# Altium PCB Injection_PCB.PcbDoc
Units mil, origin at the board's own origin, x right, y up, seen from the top; angles counter-clockwise.
Board outline 5275.59 x 5275.59 mil, 2 copper layers (Top Layer, Bottom Layer); 81 components, 94 nets, 442 pads, 422 vias.
Unrouted connection lines stored in the file: 236.
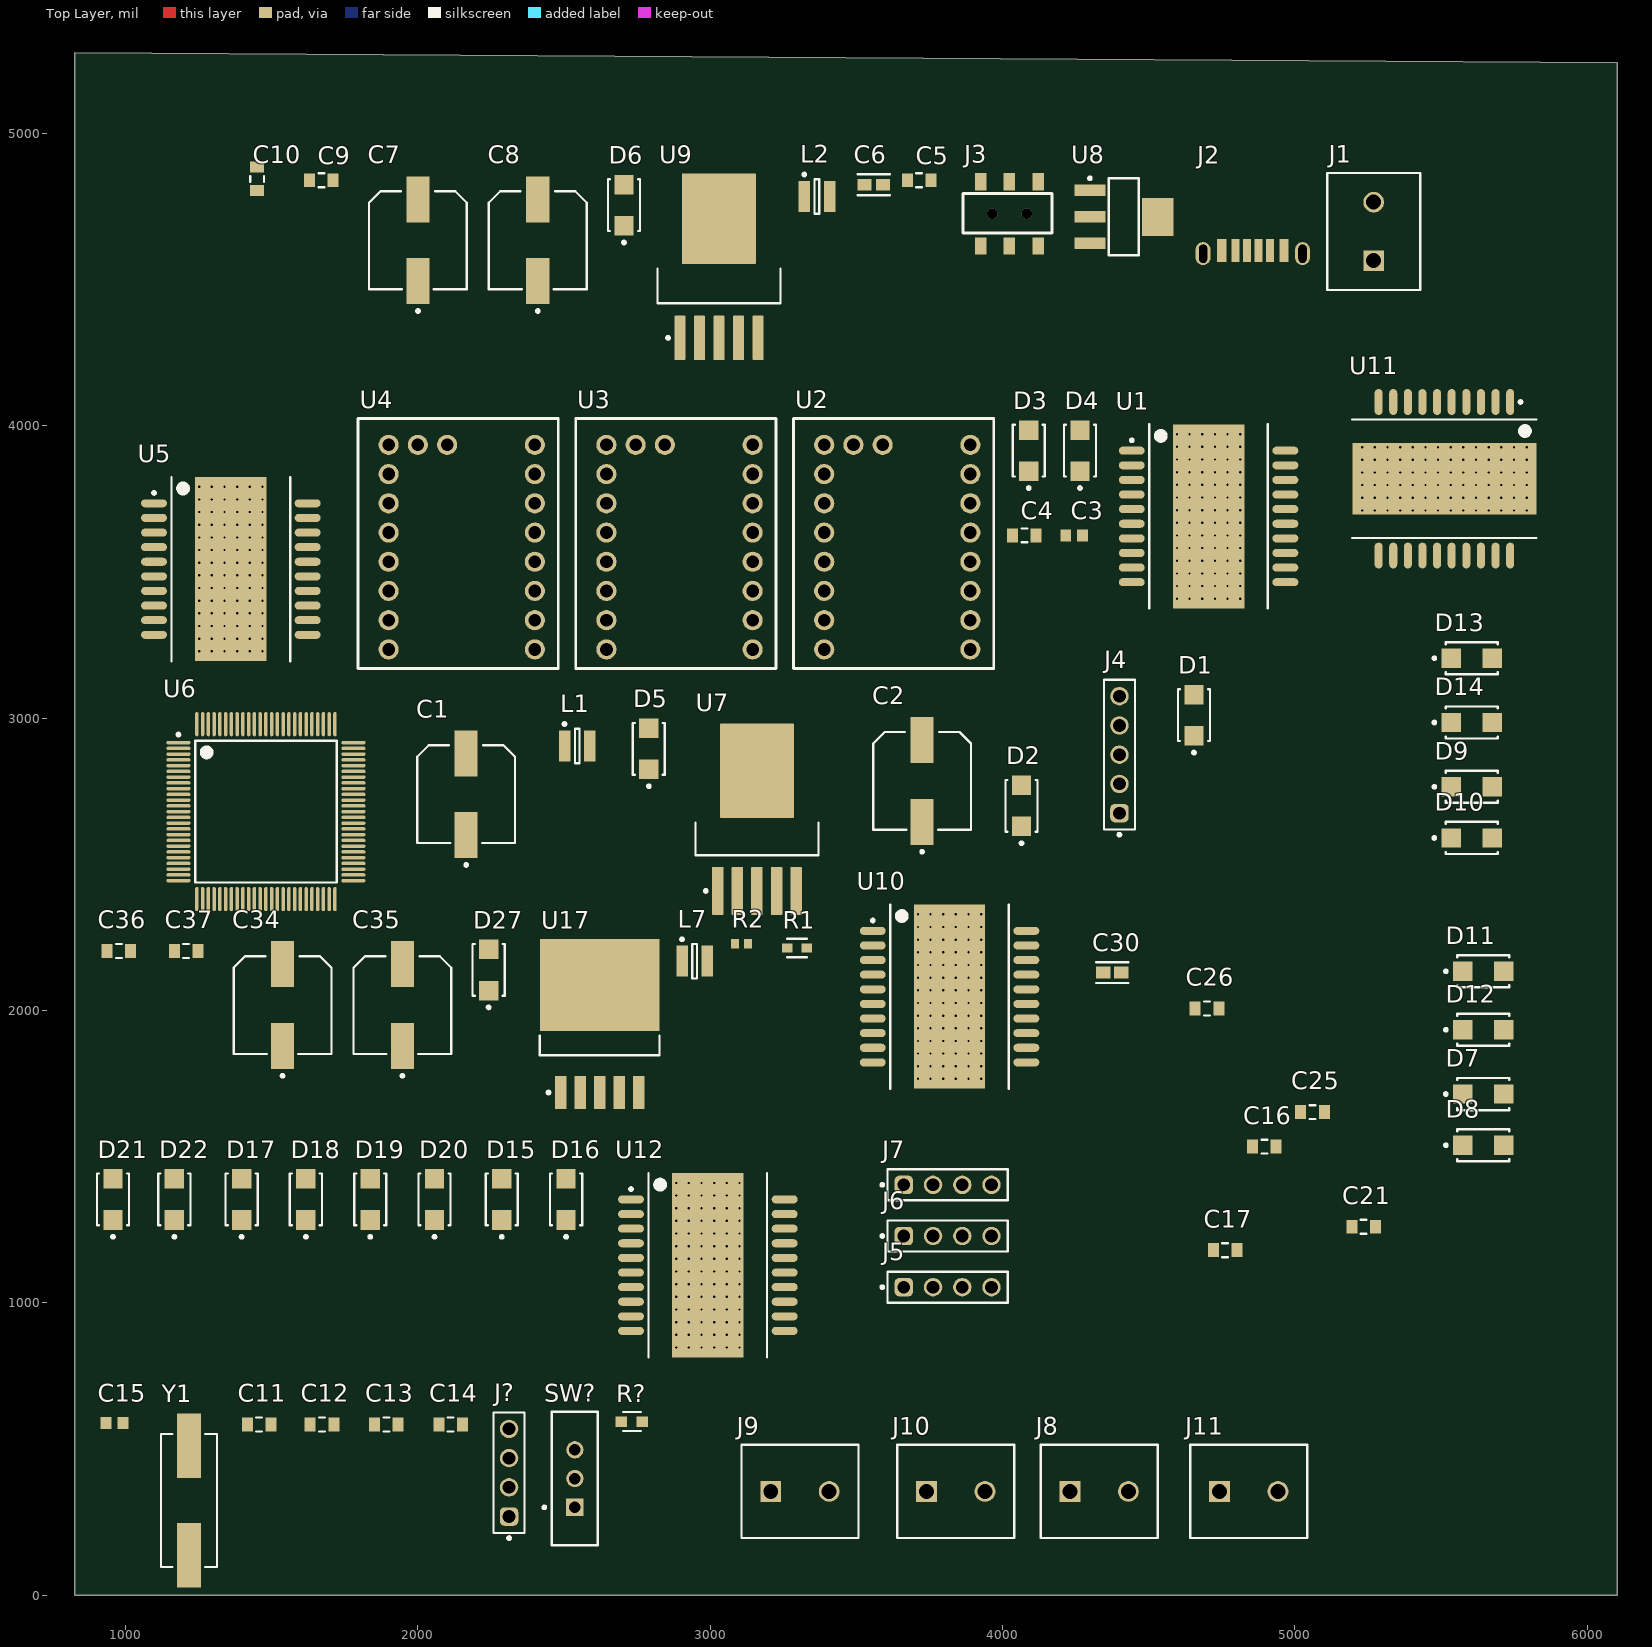
[diagram p0: Top Layer view]
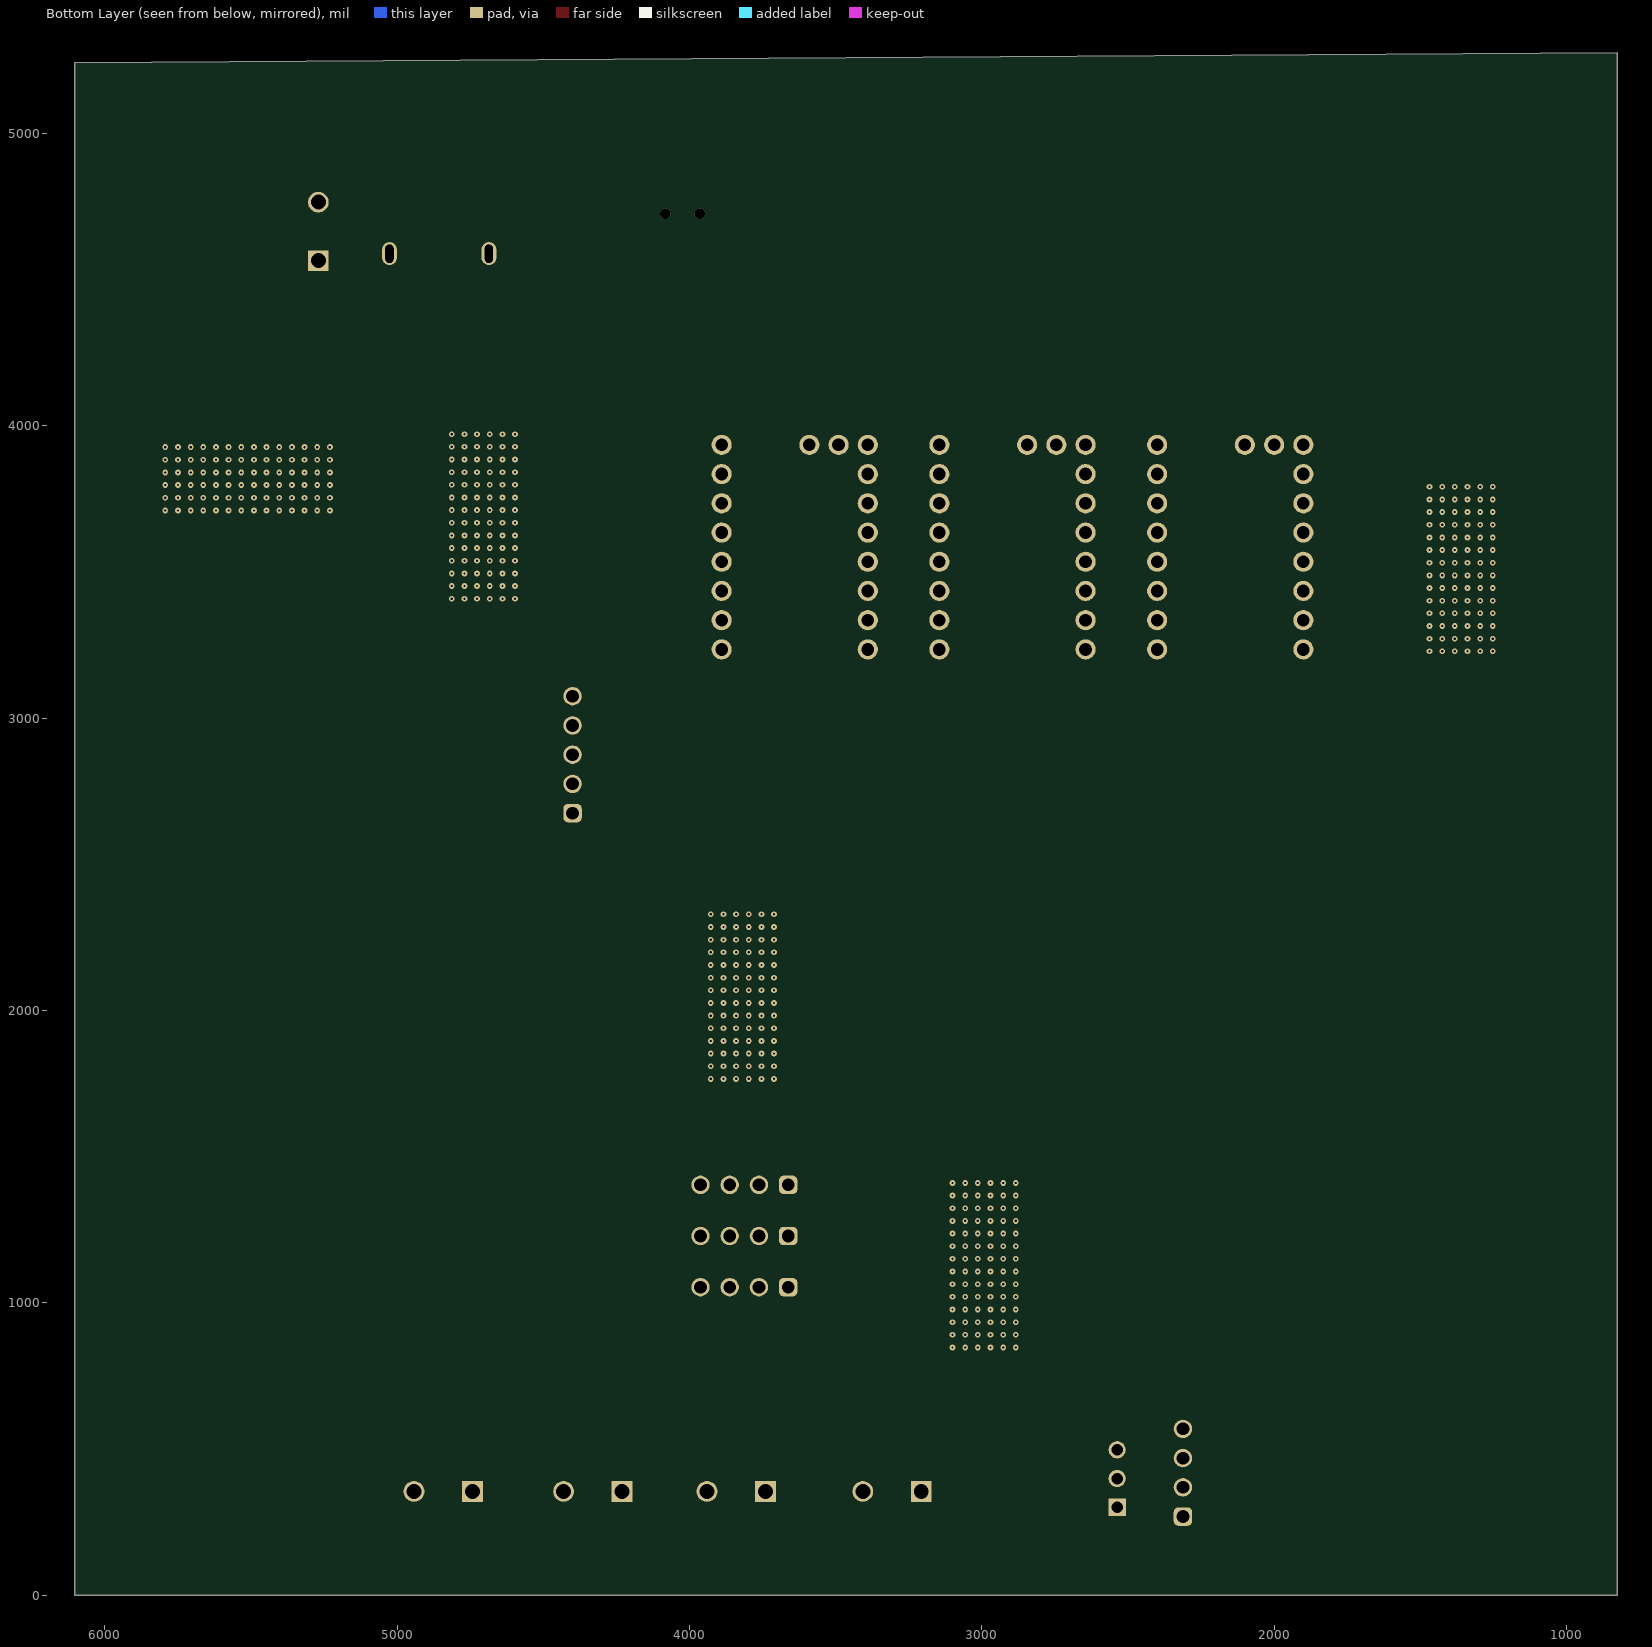
[diagram p1: Bottom Layer view, seen from below]

## Layer stack, top to bottom
Top Solder: solder mask 0.4, Solder Resist, Dk 3.5
Top Layer: signal copper 1.4
Dielectric 1: dielectric 12.6, FR-4, Dk 4.8
Bottom Layer: signal copper 1.4
Bottom Solder: solder mask 0.4, Solder Resist, Dk 3.5

## Board outline
826.77,5275.59 826.77,0 6102.36,0 6102.36,5241.55

## Design rules (kind name [scope] priority, off if disabled: settings)
Clearance [All] p1: gap=10 ignorepadtopadclearanceinfootprint=FALSE
PolygonConnect [All] p1: connectstyle=Relief reliefconductorwidth=10 reliefentries=4 polygonreliefangle="90 Angle" airgapwidth=10
RoutingVias [All] p1: holewidth=28 width=50 viastyle="Through Hole" minholewidth=28 minwidth=50 maxholewidth=28 maxwidth=50
SolderMaskExpansion [All] p1: expansion=4 istentingtop=FALSE
SupplyNets "Schematic Supply Nets_9" [InNet('+12_2')] p1: voltage=0.000
SupplyNets "Schematic Supply Nets_8" [InNet('+12_1')] p2: voltage=0.000
SupplyNets "Schematic Supply Nets_7" [InNet('+12_4')] p3: voltage=0.000
SupplyNets "Schematic Supply Nets_6" [InNet('+12_3')] p4: voltage=0.000
SupplyNets "Schematic Supply Nets_5" [InNet('+7')] p5: voltage=0.000
SupplyNets "Schematic Supply Nets_4" [InNet('GND')] p6: voltage=0.000
SupplyNets "Schematic Supply Nets_3" [InNet('+5')] p7: voltage=0.000
SupplyNets "Schematic Supply Nets_2" [InNet('+3.3')] p8: voltage=0.000
SupplyNets "Schematic Supply Nets_1" [InNet('+24')] p9: voltage=0.000
SupplyNets "Schematic Supply Nets" [InNet('VBUS')] p10: voltage=0.000
Width [All] p1: maxlimit=10 minlimit=10 preferedwidth=10
30 further rules are at their usual default settings.

## Classes and differential pairs
component class Power: C1 C2 C6 C7 C8 C16 C17 C21 C25 C26 C30 C34 C35 C36 C37 D5 D6 D27 J1 J2 J3 L1 L2 L7 R1 R2 U7 U8 U9 U17
component class Motor_Drivers: D1 D2 D3 D4 D7 D8 D9 D10 D11 D12 D13 D14 D15 D16 D17 D18 D19 D20 D21 D22 J4 J5 J6 J7 J8 J9 J10 J11 U1 U2 U3 U4 U5 U10 U11 U12
component class MCU: C3 C4 C5 C9 C10 C11 C12 C13 C14 C15 J? R? SW? U6 Y1

## Components (designator, comment, footprint, x,y, rotation, side; value= is the part's Value field where it differs from the comment)
C1 "EEEFT1E471AP" FP-FTF-MFG 2165,2740 r90 top
C2 "EEEFT1E471AP" FP-FTF-MFG 3725,2785 r90 top
C3 "GRM1885C1H220JA01D" CAPC1608X90X35ML10T15 4245,3625 r0 top
C4 "CGA3E2X7R1H104K080AA" FP-CGA3E-0_3-0_1-IPC_A 4075,3625 r0 top
C5 "CGA3E2X7R1H104K080AA" FP-CGA3E-0_3-0_1-IPC_A 3715,4840 r0 top
C6 "GRM188R60J106ME47D" FP-GRM188-0_1-e0_2_0_55-IPC_A 3560,4825 r0 top
C7 "EEEFT1E471AP" FP-FTF-MFG 2000,4635 r90 top
C8 "EEEFT1E471AP" FP-FTF-MFG 2410,4635 r90 top
C9 "CGA3E2X7R1H104K080AA" FP-CGA3E-0_3-0_1-IPC_A 1670,4840 r0 top
C10 "CGA3E2X7R1H104K080AA" FP-CGA3E-0_3-0_1-IPC_A 1450,4845 r90 top
C11 "CGA3E2X7R1H104K080AA" FP-CGA3E-0_3-0_1-IPC_A 1456.85,583.39 r0 top
C12 "CGA3E2X7R1H104K080AA" FP-CGA3E-0_3-0_1-IPC_A 1671.85,583.39 r0 top
C13 "CGA3E2X7R1H104K080AA" FP-CGA3E-0_3-0_1-IPC_A 1891.85,583.39 r0 top
C14 "CGA3E2X7R1H104K080AA" FP-CGA3E-0_3-0_1-IPC_A 2111.85,583.39 r0 top
C15 "GRM1885C1H220JA01D" CAPC1608X90X35ML10T15 961.85,588.39 r0 top
C16 "CGA3E2X7R1H104K080AA" FP-CGA3E-0_3-0_1-IPC_A 4896.1,1534.09 r0 top
C17 "CGA3E2X7R1H104K080AA" FP-CGA3E-0_3-0_1-IPC_A 4761.77,1179.76 r0 top
C21 "CGA3E2X7R1H104K080AA" FP-CGA3E-0_3-0_1-IPC_A 5235.24,1259.84 r0 top
C25 "CGA3E2X7R1H104K080AA" FP-CGA3E-0_3-0_1-IPC_A 5060.39,1652.2 r0 top
C26 "CGA3E2X7R1H104K080AA" FP-CGA3E-0_3-0_1-IPC_A 4699.72,2006.54 r0 top
C30 "UMK107SD152KA-T" FP-0603-L_1_6_0_1-W_0_8_0-IPC_A 4375.67,2129.65 r0 top
C34 "EEEFT1E471AP" FP-FTF-MFG 1536.85,2018.39 r90 top
C35 "EEEFT1E471AP" FP-FTF-MFG 1946.85,2018.39 r90 top
C36 "CGA3E2X7R1H104K080AA" FP-CGA3E-0_3-0_1-IPC_A 976.85,2203.39 r0 top
C37 "CGA3E2X7R1H104K080AA" FP-CGA3E-0_3-0_1-IPC_A 1206.85,2203.39 r0 top
D1 "SSA34-E3/61T" FP-95400-MFG 4655,3010 r90 top
D2 "SSA34-E3/61T" FP-95400-MFG 4065,2700 r90 top
D3 "SSA34-E3/61T" FP-95400-MFG 4090,3915 r90 top
D4 "SSA34-E3/61T" FP-95400-MFG 4265,3915 r90 top
D5 "SSA34-E3/61T" FP-95400-MFG 2790,2895 r90 top
D6 "SSA34-E3/61T" FP-95400-MFG 2705,4755 r90 top
D7 "SSA34-E3/61T" FP-95400-MFG 5644.72,1713.86 r0 top
D8 "SSA34-E3/61T" FP-95400-MFG 5644.72,1538.86 r0 top
D9 "SSA34-E3/61T" FP-95400-MFG 5605.35,2765.08 r0 top
D10 "SSA34-E3/61T" FP-95400-MFG 5605.35,2590.08 r0 top
D11 "SSA34-E3/61T" FP-95400-MFG 5644.72,2133.86 r0 top
D12 "SSA34-E3/61T" FP-95400-MFG 5644.72,1933.86 r0 top
D13 "SSA34-E3/61T" FP-95400-MFG 5605.35,3205.08 r0 top
D14 "SSA34-E3/61T" FP-95400-MFG 5605.35,2985.08 r0 top
D15 "SSA34-E3/61T" FP-95400-MFG 2286.85,1353.39 r90 top
D16 "SSA34-E3/61T" FP-95400-MFG 2506.85,1353.39 r90 top
D17 "SSA34-E3/61T" FP-95400-MFG 1396.85,1353.39 r90 top
D18 "SSA34-E3/61T" FP-95400-MFG 1616.85,1353.39 r90 top
D19 "SSA34-E3/61T" FP-95400-MFG 1836.85,1353.39 r90 top
D20 "SSA34-E3/61T" FP-95400-MFG 2056.85,1353.39 r90 top
D21 "SSA34-E3/61T" FP-95400-MFG 956.85,1353.39 r90 top
D22 "SSA34-E3/61T" FP-95400-MFG 1166.85,1353.39 r90 top
D27 "SSA34-E3/61T" FP-95400-MFG 2241.85,2138.39 r90 top
J1 "1729128" PHOE-1729128-2_V 5270,4665 r90 top
J2 "USBC" USBC 4750,4600 r0 top
J3 "SWITCH" PCBComponent_1 3925,4615 r0 top
J4 "61300511121" 61300511121 4400,2875 r90 top
J5 "61300411121" 61300411121 3812.44,1053.23 r0 top
J6 "61300411121" 61300411121 3812.44,1228.23 r0 top
J7 "61300411121" 61300411121 3812.44,1403.23 r0 top
J8 "1729128" PHOE-1729128-2_V 4330.71,354.33 r0 top
J9 "1729128" PHOE-1729128-2_V 3307.09,354.33 r0 top
J10 "1729128" PHOE-1729128-2_V 3840.16,354.33 r0 top
J11 "1729128" PHOE-1729128-2_V 4842.52,354.33 r0 top
J? "61300411121" 61300411121 2311.85,418.39 r90 top
L1 "SRN3015-330M" BOUR-SRN3015-2_V 2545,2905 r0 top
L2 "SRN3015-470M" BOUR-SRN3015-2_V 3365,4785 r0 top
L7 "SRN3015-470M" BOUR-SRN3015-2_V 2946.85,2168.39 r0 top
R1 "RT0603FRE0730KL" FP-RT0603-MFG 3296.85,2213.39 r0 top value=30KΩ
R2 "CRCW06036K80FKEA" RESC1609X50X30LL10T20 3106.85,2228.39 r0 top value=6.8k
R? "RP73D1J10KBTDG" FP-RP731J-MFG 2731.85,593.39 r0 top value=10KΩ
SW? "EG1218" ESWI-EG1218_V 2536.85,398.39 r90 top
U1 "L298P" STM-PowerSO20_M 4705,3690 r0 top
U2 "TMC2209" TCM2209_breakout 3390,3235 r0 top
U3 "TMC2209" TCM2209_breakout 2645,3235 r0 top
U4 "TMC2209" TCM2209_breakout 1900,3235 r0 top
U5 "L298P" STM-PowerSO20_M 1360,3510 r0 top
U6 "STM32F407VET6" STM-LQFP100_M 1480,2680 r0 top
U7 "LM2596S-3.3" KTT0005B_N 3160,2655 r90 top
U8 "LD1117AS33TR" SOT-223_M 4415,4715 r0 top
U9 "LM2596S-5.0" KTT0005B_L 3030,4545 r90 top
U10 "L298P" STM-PowerSO20_M 3818.9,2047.24 r0 top
U11 "L298P" STM-PowerSO20_M 5511.81,3818.9 r270 top
U12 "L298P" STM-PowerSO20_M 2991.85,1128.39 r0 top
U17 "LM2596S-ADJ" TS5B_L 2621.85,1953.39 r90 top
Y1 "ABLS-8.000MHZ-B2-T" FP-ABLS-MFG 1216.85,323.39 r90 top

## Footprints (in the part's own frame and the unit in brackets; to place one, negate y for a bottom-side part, rotate by r counter-clockwise, add the part's x,y. Pads: shape width x height; smd on the part's side, far side on the other; paste and mask are expansions set on the pad)
61300411121 [mm] "Pin Header, pitch 2.54 mm, THT, Vertical, single row, 4p"
  rrect50% 1.6x1.6 hole 1.1: 1(-3.81,0)
  round 1.6 hole 1.1: 2(-1.27,0) 3(1.27,0) 4(3.81,0)
  silkscreen extent -5.8,-1.35 5.23,1.35, body extent -5.08,-1.27 5.08,1.27, height 8.57
61300511121 [mm] "Pin Header, pitch 2.54 mm, THT, Vertical, single row, 5p"
  rrect50% 1.6x1.6 hole 1.1: 1(-5.08,0)
  round 1.6 hole 1.1: 2(-2.54,0) 3(0,0) 4(2.54,0) 5(5.08,0)
  silkscreen extent -7.07,-1.35 6.5,1.35, body extent -6.35,-1.27 6.35,1.27, height 8.57
BOUR-SRN3015-2_V [mm] "SMD, 2-Leads, Body 3x3mm, Height 1.5mm"
  rect 1x2.7 smd: 1(-1.1,0) 2(1.1,0)
  silkscreen extent -1.22,-1.5 0.2,2.02, body extent -1.5,-1.5 1.5,1.5, height 1.5
CAPC1608X90X35ML10T15 [mm] "Chip Capacitor, 2-Leads, Body 1.7x0.9mm, IPC Low Density"
  rect 0.95x1.05 smd: 1(-0.725,0) 2(0.725,0)
  body extent -0.85,-0.45 0.85,0.45, height 0.9
ESWI-EG1218_V [mm] "THD, 3-Leads, Body 11.6x4mm, Pitch 2.5mm"
  rect 1.5x1.5 hole 1: 1(-2.5,0)
  round 1.5 hole 1: 2(0,0) 3(2.5,0)
  silkscreen extent -5.8,-2 5.8,2.77, body extent -5.8,-2 5.8,2, height 7.4
FP-0603-L_1_6_0_1-W_0_8_0-IPC_A [mil]
  rect 49.52x39.85 smd paste+0 mask+0: 1(-30.6,0) 2(30.6,0)
  silkscreen extent -55,-36 55,36, body extent -75,-40 75,40, height 10
FP-95400-MFG [mm]
  rect 1.7x1.68 smd paste+0 mask+0: 1(-1.79,0) 2(1.79,0)
  silkscreen extent -3.37,-1.4 2.25,1.4, body extent -2.74,-1.5 2.74,1.5, height 0.25
FP-ABLS-MFG [mm]
  rect 5.6x2.1 smd paste+0 mask+0: 1(-4.75,0) 2(4.75,0)
  silkscreen extent -5.77,-2.42 5.77,2.42, body extent -7.65,-2.52 7.65,2.52, height 0.25
FP-CGA3E-0_3-0_1-IPC_A [mm]
  rect 0.956x1.206 smd paste+0 mask+0: 1(-1.025,0) 2(1.025,0)
  silkscreen extent -0.25,-0.6 0.25,0.6, body extent -2,-1.1 2,1.1, height 0.25
FP-FTF-MFG [mm]
  rect 4x2 smd paste+0 mask+0: 1(-3.55,0) 2(3.55,0)
  silkscreen extent -6.27,-4.25 4.25,4.25, body extent -5.8,-4.5 5.8,4.5, height 0.25
FP-GRM188-0_1-e0_2_0_55-IPC_A [mil]
  rect 47.57x39.85 smd paste+0 mask+0: 1(-31.57,0) 2(31.57,0)
  silkscreen extent -55,-36 55,36, body extent -75,-40 75,40, height 10
FP-RP731J-MFG [mm]
  rect 1x0.9 smd paste+0 mask+0: 1(-0.9,0) 2(0.9,0)
  silkscreen extent -0.77,-0.82 0.77,0.82, body extent -1.5,-0.55 1.5,0.55, height 0.25
FP-RT0603-MFG [mm]
  rect 0.9x0.8 smd paste+0 mask+0: 1(-0.85,0) 2(0.85,0)
  silkscreen extent -0.85,-0.81 0.86,0.8, body extent -1.4,-0.55 1.4,0.55, height 0.25
KTT0005B_L [mm] "DPAK, 5-Leads, Body 10.65x9.65mm, Pitch 1.7mm, IPC High Density"
  rrect11% 3.85x0.95 smd: 1(-6.2,3.4) 2(-6.2,1.7) 3(-6.2,0) 4(-6.2,-1.7) 5(-6.2,-3.4)
  rrect2% 7.9x6.4 smd: 6(4.15,0)
  silkscreen extent -6.32,-5.35 -0.2,5.35, body extent -3.2,-5.32 6.45,5.33, height 4.83
KTT0005B_N [mm] "DPAK, 5-Leads, Body 10.65x9.65mm, Pitch 1.7mm, IPC Medium Density"
  rrect10% 4.15x1 smd: 1(-6.25,3.4) 2(-6.25,1.7) 3(-6.25,0) 4(-6.25,-1.7) 5(-6.25,-3.4)
  rrect2% 8.2x6.4 smd: 6(4.2,0)
  silkscreen extent -6.37,-5.35 -0.3,5.35, body extent -3.15,-5.32 6.5,5.33, height 4.83
PCBComponent_1 [mm]
  rect 1x1.5 smd: 1(0,0) 2(2.5,0) 3(5,0) 4(0,5.6) 5(2.5,5.6) 6(5,5.6)
  silkscreen extent -1.52,1.14 6.22,4.57
PHOE-1729128-2_V [mm] "Receptacle, 2-Leads, Body 8.1x10.16mm, Pitch 5.08mm"
  rect 1.8x1.8 hole 1.3: 1(-2.54,0)
  round 1.8 hole 1.3: 2(2.54,0)
  silkscreen extent -5.08,-4.05 5.08,4.05, body extent -5.65,-4.05 5.08,4.05, height 10.01
RESC1609X50X30LL10T20 [mm] "Chip Resistor, 2-Leads, Body 1.55x0.85mm, IPC High Density"
  rect 0.7x0.85 smd: 1(-0.575,0) 2(0.575,0)
  body extent -0.82,-0.48 0.82,0.48, height 0.5
SOT-223_M [mm] "SOT223, 4-Leads, Body 6.5x3.5mm, Pitch 2.3mm, Lead Span 7mm, IPC Low Density"
  rect 2.7x1 smd: 1(-2.95,2.3) 2(-2.95,0) 3(-2.95,-2.3)
  rect 2.7x3.3 smd: 4(2.95,0)
  silkscreen extent -3.07,-3.35 1.3,3.47, body extent -1.85,-3.35 1.85,3.35, height 1.8
STM-LQFP100_M [mm] "Thin QFP, 100-Leads, Body 14x14mm, Pitch 0.5mm, IPC Low Density"
  oval 2.1x0.3 smd: 1(-7.6,6) 2(-7.6,5.5) 3(-7.6,5) 4(-7.6,4.5) 5(-7.6,4) 6(-7.6,3.5) 7(-7.6,3) 8(-7.6,2.5) 9(-7.6,2) 10(-7.6,1.5) 11(-7.6,1) 12(-7.6,0.5) 13(-7.6,0) 14(-7.6,-0.5) 15(-7.6,-1) 16(-7.6,-1.5) 17(-7.6,-2) 18(-7.6,-2.5) 19(-7.6,-3) 20(-7.6,-3.5) 21(-7.6,-4) 22(-7.6,-4.5) 23(-7.6,-5) 24(-7.6,-5.5) 25(-7.6,-6) 51(7.6,-6) 52(7.6,-5.5) 53(7.6,-5) 54(7.6,-4.5) 55(7.6,-4) 56(7.6,-3.5) 57(7.6,-3) 58(7.6,-2.5) 59(7.6,-2) 60(7.6,-1.5) 61(7.6,-1) 62(7.6,-0.5) 63(7.6,0) 64(7.6,0.5) 65(7.6,1) 66(7.6,1.5) 67(7.6,2) 68(7.6,2.5) 69(7.6,3) 70(7.6,3.5) 71(7.6,4) 72(7.6,4.5) 73(7.6,5) 74(7.6,5.5) 75(7.6,6)
  oval 0.3x2.1 smd: 26(-6,-7.6) 27(-5.5,-7.6) 28(-5,-7.6) 29(-4.5,-7.6) 30(-4,-7.6) 31(-3.5,-7.6) 32(-3,-7.6) 33(-2.5,-7.6) 34(-2,-7.6) 35(-1.5,-7.6) 36(-1,-7.6) 37(-0.5,-7.6) 38(0,-7.6) 39(0.5,-7.6) 40(1,-7.6) 41(1.5,-7.6) 42(2,-7.6) 43(2.5,-7.6) 44(3,-7.6) 45(3.5,-7.6) 46(4,-7.6) 47(4.5,-7.6) 48(5,-7.6) 49(5.5,-7.6) 50(6,-7.6) 76(6,7.6) 77(5.5,7.6) 78(5,7.6) 79(4.5,7.6) 80(4,7.6) 81(3.5,7.6) 82(3,7.6) 83(2.5,7.6) 84(2,7.6) 85(1.5,7.6) 86(1,7.6) 87(0.5,7.6) 88(0,7.6) 89(-0.5,7.6) 90(-1,7.6) 91(-1.5,7.6) 92(-2,7.6) 93(-2.5,7.6) 94(-3,7.6) 95(-3.5,7.6) 96(-4,7.6) 97(-4.5,7.6) 98(-5,7.6) 99(-5.5,7.6) 100(-6,7.6)
  silkscreen extent -7.72,-6.15 6.15,6.82, body extent -7,-7 7,7, height 1.6
STM-PowerSO20_M [mm] "SOIC, 20-Leads, Body 16x11.1mm, Pitch 1.27mm, Thermal Pad 16x6.2mm, IPC Low Density"
  oval 2.25x0.7 smd: 1(-6.675,5.715) 2(-6.675,4.445) 3(-6.675,3.175) 4(-6.675,1.905) 5(-6.675,0.635) 6(-6.675,-0.635) 7(-6.675,-1.905) 8(-6.675,-3.175) 9(-6.675,-4.445) 10(-6.675,-5.715) 11(6.675,-5.715) 12(6.675,-4.445) 13(6.675,-3.175) 14(6.675,-1.905) 15(6.675,-0.635) 16(6.675,0.635) 17(6.675,1.905) 18(6.675,3.175) 19(6.675,4.445) 20(6.675,5.715)
  rect 6.2x16 smd: 21(0,0)
  silkscreen extent -6.8,-8 5.15,8, body extent -7.1,-8 7.1,8, height 3.6
TCM2209_breakout [mm]
  round 1.75 hole 1.1: 1(0,17.78) 2(0,15.24) 3(0,12.7) 4(0,10.16) 5(0,7.62) 6(0,5.08) 7(0,2.54) 8(0,0) 9(12.7,0) 9(12.7,0) 10(12.7,2.54) 11(12.7,5.08) 12(12.7,7.62) 13(12.7,10.16) 14(12.7,12.7) 15(12.7,15.24) 16(12.7,17.78) 17(5.08,17.78) 18(2.54,17.78)
  silkscreen extent -2.67,-1.65 14.73,20.07, body extent -1.27,-1.27 13.97,19.05, height 16.75
TS5B_L [mm] "D2-PAK, 6-Leads, Body 8.6x10.2mm, Pitch 1.7mm, Lead Span 14.1mm, IPC High Density"
  rect 2.9x1 smd: 1(-5.95,3.4) 2(-5.95,1.7) 3(-5.95,0) 4(-5.95,-1.7) 5(-5.95,-3.4)
  rect 8x10.4 smd: 6(3.4,0)
  silkscreen extent -6.07,-5.2 -1,5.2, body extent -2.7,-5.2 6.19,5.2, height 4.65
USBC [mm]
  rect 0.8x2 smd: 1(0,0) 6(5.4,0)
  rect 0.7x2 smd: 2(1.2,0) 3(2.2,0) 4(3.2,0) 5(4.2,0)
  oval 1.3x2 hole 0.7 slot 1.6 at 90 deg: ""(-1.62,-0.28) ""(7.02,-0.28)
  body extent -1.83,-1.18 7.37,6.77, height 3.2

## Part data
C1 C2 C7 C8 C34 C35: library part CMP-05427-000040-1, "CAP ALUM 470UF 20% 25V SMD", Capacitance=470uF, Case/Package=Radial, Dielectric Material=Aluminium, ESR (Equivalent Series Resistance)=80mR, LCSC=C178591, Leakage Current=117.5uA, Max Operating Temperature=105°C, Min Operating Temperature=-55°C, Package Quantity=500, Ripple Current=850mA, Tolerance=20%, Voltage=25V, Construction=Cylindrical, Contact Plating=Tin, Diameter=8mm, Features="General Purpose", Height=10.2mm, Height - Seated (Max)=0.413inch, Lead Diameter=0.9mm, Lead Free="Lead Free", Lead Pitch=3.1mm, Length=10.2mm, Life (Hours)=2000Hour, Mount="Surface Mount", Number of Pins=2, Packaging="Tape and Reel", Radiation Hardening=No, REACH SVHC="No SVHC", Ripple Current (AC)=850mA, RoHS Compliant=Yes, Series=FT, Termination=SMD/SMT, Voltage Rating=25V, Voltage Rating (DC)=25V
C3 C15: library part CMP-2000-04945-1, "Chip Capacitor, 22 pF, +/- 5%, 50 V, -55 to 125 degC, 0603 (1608 Metric), RoHS, Tape and Reel", Capacitance=22pF, Case Size/Dimension=0603, Dielectric=C0G, Manufacturer=Murata, Package Description="2-Pin Surface Mount Device, Body 1.6 x 0.8 mm", Package Reference=603, Rated Voltage=50V, Tolerance (%)=±5%, Datasheet URL=https://datasheet.ciiva.com/11786/0900766b807a1cab-11786398.pdf, Datasheet Version=Jul-06, Manufacturer URL=http://www.murata.com/
C4 C5 C9 C10 C11 C12 C13 C14 C16 C17 C21 C25 C26 C36 C37: library part CMP-2000-07546-2, "Cap Ceramic 100nF 50V X7R 10% Pad SMD 0603 +125°C Automotive T/R", Capacitance=100nF, Case Code (Imperial)=0603, Case Code (Metric)=1608, Dielectric=X7R, LCSC=C14663, Max Operating Temperature=125°C, Min Operating Temperature=-55°C, Package Quantity=1, Ratings=AEC-Q200, Tolerance=10%, Voltage=50V, Case/Package=0603, Composition=Ceramic, Depth=0.8mm, Height=0.8mm, Lead Free="Lead Free", Length=1.6mm, Mount="Surface Mount", Packaging="Tape and Reel", Radiation Hardening=No, REACH SVHC="No SVHC", Termination=SMD/SMT, Thickness=0.035inch, Voltage Rating=50V, Voltage Rating (DC)=50V, Weight=7.1E-05oz, Width=0.8mm
C6: library part CMP-2006-02792-2, "Chip Multilayer Ceramic Capacitors for General Purpose, 0603, 10uF, X5R, 15%, 20%, 6.3V", Capacitance=10uF, Case Code (Imperial)=0603, Case Code (Metric)=1608, Dielectric=X5R, LCSC=C385035, Max Operating Temperature=85°C, Min Operating Temperature=-55°C, Package Quantity=4000, Tolerance=20%, Voltage=6.3V, Case/Package=0603, Depth=0.8mm, Height=0.8mm, Lead Free="Lead Free", Length=1.6mm, Material=Ceramic, Mount="Surface Mount", Packaging="Tape and Reel", Radiation Hardening=No, REACH SVHC="No SVHC", Termination=SMD/SMT, Thickness=0.035inch, Voltage Rating=6.3V, Voltage Rating (DC)=6.3V, Width=0.031inch
C30: library part CMP-14477-003947-2, "None", Capacitance=1.5nF, Case Code (Imperial)=0603, Case Code (Metric)=1608, Dielectric Material=Ceramic, Max Operating Temperature=125°C, Min Operating Temperature=-55°C, Package Quantity=4000, Tolerance=10%, Voltage Rating=50V, Case/Package=0603, Construction=Flat, Depth=0.8mm, Halogen Free="Halogen Free", Height=0.8mm, Lead Free="Lead Free", Length=0.063inch, Mount="Surface Mount", Number of Pins=2, Packaging="Tape and Reel", Radiation Hardening=No, RoHS Compliant=Yes, Series=CFCAP™, Termination=SMD/SMT, Thickness=0.035inch, Voltage Rating (DC)=50V, Width=0.031inch
D1 D2 D3 D4 D5 D6 D7 D8 D9 D10 D11 D12 D13 D14 D15 D16 D17 D18 D19 D20 D21 D22 D27: library part CMP-02539-000022-2, "DIODE SCHOTTKY 40V 3A DO214AC", Average Rectified Current=3A, Case/Package=SMA, Forward Voltage=490mV, LCSC=C466998, Max Forward Surge Current (Ifsm)=75A, Max Operating Temperature=150°C, Max Repetitive Reverse Voltage (Vrrm)=40V, Max Reverse Current=200uA, Min Operating Temperature=-65°C, Package Quantity=1, Contact Plating=Tin, Current Rating=3A, Element Configuration=Single, Forward Current=3A, Height=2.087mm, Lead Free="Lead Free", Length=4.5mm, Max Reverse Leakage Current=200uA, Max Reverse Voltage (DC)=40V, Max Surge Current=75A, Mount="Surface Mount", Number of Pins=2, Output Current=3A, Packaging="Tape and Reel", Peak Non-Repetitive Surge Current=75A, Polarity=Standard, Radiation Hardening=No, RoHS Compliant=Yes, Voltage Rating (DC)=40V, Width=2.79mm
J1 J8 J9 J10 J11: library part CMP-2000-05815-1, "PCB Terminal Block, 13.5 A, 400 V, 2-Pin THD, RoHS, Bulk", Current Rating=13500mA, Manufacturer="Phoenix Contact", Package Description="2-Pin Through Hole Device, Body 8.1 x 10.16 mm, Pitch 5.08 mm", Package Reference=1729128-2, Package Version=03/2015, Voltage Rating=400V, Datasheet URL=https://datasheet.ciiva.com/16046/1729128-16046181.pdf, Datasheet Version=12/2013, Manufacturer URL=http://www.phoenixcontact.com/, Mounting Technology=ThroughHole, No. of Positions=2, No. of Rows=1, Orientation=Horizontal, Package URL=https://www.phoenixcontact.com/online/portal/pi/pxc/product_detail_page/!ut/p/b1/3VdJjqNKFDxLH8AFycySyWY2ozFsEPOMMQaDOX1XedGL_1Vdm5YXJleknhSKeBkvI6EA8ncAo3AYoDhBQGco6KN7VURTdemj9us_IEKEZo_YHiPAEWEFmDGOHMORkqKYCORBZxgL7ZoaZYcbFFUZ3fqxSY6GOuxydWUuHqz1ynmMFygu583Bob0Ewr6Sd_l-5m-kAueHiB0jpRwZwe58wwtkpxtMYd_LmGcDRU02dRNEyWt6Y2ti5pSyJ_reIkzIulrqApdnbT11V5jnCKbYNCvhEM1MCpPByat_X379-iThf08CI5GfOPqfBeS3BRoBOdD55AKVv0iLwCMq-2BrzXWSGRH7pUGD9uwXQjiph3xL0DKQwdGa0JImiIOmBNOestqgwTHSSs2oOep-78apyXQBvNi8ZLaFjvjWvcaUEBu0MC6Wbe-d6mB0FAebo2lUWinqYaZs5DAYzV0RP9yitUjnGJ0iI9xhZkT42OCQNUJJhkgWINNQLP2JFP6OpMg3JCVg70jqHT0lvKOnhHf0lPuOnnLf0VPuWx6_dxwUIvwk5WMkT0kLL1mh61l2yZVSzG3pYV_bqo-mj6uMKwKwdnnW8Jh5RTOJzMOA5c-eJDaZQw4mTMPH02PvS_ZAqNVjVTo2WyYLkwH_KU1mmmG5kjRhDqPXLwwVHvVOjCM60-fpXvTDfMGW1PVFVS1r4e4yVDk4ZdNbkUHvqPqQSeian4UD39fNKmachqdJ1NJbyk8rXT9mXTvPk3oE5meulKGgiruPJek-4I9hTT6G8ZLOyRSm2RRVbThERQad5OS28hdt4YW4vG0stgYYzsWsK4_7y6DZMjJSCqri1kyiZR5vD7pwIrNR7QwPHTcLTI5qT7eRlpHrdGiupYlqQDJ7zy_CND8fWWBoLRXxk1RVcXiBQwbTD4Xi7KL-FuO94t9xaqweXzH, Packing=Bulk, PartNumber=1729128, Pitch=5.08mm, RoHS=TRUE
J2: LCSC=C5187411
J3: library part SMD_SWITCH, LCSC=C2837066
J4: library part CMP-1502-01068-3, Color=Black, Contact Resistance=20mΩ, Current Rating=3A, Max Operating Temperature=105°C, Min Operating Temperature=-40°C, Operating Supply Voltage=250V, Connector Type="Male Pin", Contact Material=Copper, Contact Mating Length=5.9944mm, Contact Plating=Gold, Gender=Male, Height=8.89mm, Lead Free="Lead Free", Lead Pitch=2.54mm, Mount="Through Hole", NexarPartId=32855526, Number of Contacts=5, Number of Pins=5, Number of Positions=5, Number of Rows=1, Orientation=Vertical, Packaging=Bulk, Pitch=2.54mm, REACH SVHC=Unknown, RoHS=Compliant, Termination=Solder, Voltage Rating=250V
J5 J6 J7 J?: library part CMP-1502-01064-3, Color=Black, Contact Resistance=20mΩ, Current Rating=3A, Max Operating Temperature=105°C, Min Operating Temperature=-40°C, Operating Supply Voltage=250V, Connector Type="Male Pin", Contact Material=Copper, Contact Mating Length=5.9944mm, Contact Plating=Gold, Gender=Male, Height=8.89mm, Lead Free="Lead Free", Lead Pitch=2.54mm, Mount="Through Hole", NexarPartId=32855522, Number of Contacts=4, Number of Pins=4, Number of Positions=4, Number of Rows=1, Orientation=Vertical, Packaging=Bulk, Pitch=2.54mm, REACH SVHC=Unknown, RoHS=Compliant, Termination=Solder, Voltage Rating=250V
L1: library part CMP-0007-00002-1, "Semi-shielded Power Inductor, 33 uH, +/- 20%, 0.5 A, -40 to 125 degC, 3 x 3 x 1.5 mm SMD, RoHS and Halogen Free, Tape and Reel", Inductance="33 uH", Inductance tolerance="+/- 20%", LCSC=C2903004, Manufacturer=Bourns, Operating Temperature="-40 to 125 degC", Rated current="0.5 A", Resistance to Solder Heat="+260 degC for 10 sec.", ComponentLink1Description="Manufacturer URL", ComponentLink1URL=http://www.bourns.com/, ComponentLink2Description=Datasheet, ComponentLink2URL=http://www.bourns.com/data/global/pdfs/SRN3015.pdf, ComponentLink3Description="Package Specification", ComponentLink3URL=http://www.bourns.com/data/global/pdfs/SRN3015.pdf, DatasheetVersion=Aug-11, DCR Max="0.959 Ohm", Isat="0.46 A", Mounting Technology="Surface Mount", PackageDescription="2-Pin SMD, Body 3 x 3 mm, Height 1.5 mm", PackageReference=SRN3015, Packing="Tape and Reel", PartNumber=SRN3015-330M, RoHS=TRUE, SRF Min="22 MHz"
L2 L7: library part CMP-0007-00006-1, "Semi-shielded Power Inductor, 47 uH, +/- 20%, 0.4 A, -40 to 125 degC, 3 x 3 x 1.5 mm SMD, RoHS and Halogen Free, Tape and Reel", Inductance="47 uH", Inductance tolerance="+/- 20%", LCSC=C3222246, Manufacturer=Bourns, Operating Temperature="-40 to 125 degC", Rated current="0.4 A", Resistance to Solder Heat="+260 degC for 10 sec.", ComponentLink1Description="Manufacturer URL", ComponentLink1URL=http://www.bourns.com/, ComponentLink2Description=Datasheet, ComponentLink2URL=http://www.bourns.com/data/global/pdfs/SRN3015.pdf, ComponentLink3Description="Package Specification", ComponentLink3URL=http://www.bourns.com/data/global/pdfs/SRN3015.pdf, DatasheetVersion=Aug-11, DCR Max="1.406 Ohm", Isat="0.38 A", Mounting Technology="Surface Mount", PackageDescription="2-Pin SMD, Body 3 x 3 mm, Height 1.5 mm", PackageReference=SRN3015, Packing="Tape and Reel", PartNumber=SRN3015-470M, RoHS=TRUE, SRF Min="18 MHz"
R1: library part CMP-2000-04724-2, "RES SMD 30K OHM 1% 1/10W 0603", Manufacturer=Yageo, Package=RT0603, Power Rating=0.1W, Resistance=30KΩ, Temperature="-55°C to +155°C", Temperature Coefficient="50 ppm/°C", Temperature Range High=+155°C, Temperature Range Low=-55°C, Tolerance=0.01, Voltage Rating=75V, Automotive=No, Category=Res, ComponentLink2Description=Datasheet, ComponentLink2URL=http://www.yageo.com/documents/recent/PYu-RT_1-to-0.01_RoHS_L_9.pdf, Composition="Thin Film", Device Class L1="Passive Components", Device Class L2=Resistors, Device Class L3="Chip SMD Resistors", Digikey Description="RES SMD 30K OHM 1% 1/10W 0603", Footprint Url=http://www.yageo.com/exep/pages/download/literatures/PYu-R_Mount_10.pdf, Height=0.55mm, Ipc Land Pattern Name=RESC16080X45, Lead Free=Yes, Manufacturer Part Number=RT0603FRE0730KL, Mouser Description="Thin Film Resistors - SMD 1/10W 30K ohm 1% 50ppm", Octopart=https://octopart.com/rt0603fre0730kl-yageo-1290535, RoHS=TRUE, Series=RT
R2: library part CMP-2000-03550-1, LCSC=C269697, Manufacturer="Vishay Dale", Part Number=CRCW06036K80FKEA
R?: library part CMP-03211-006887-1, "TE CONNECTIVITY / HOLSWORTHY SMD Chip Resistor, Thin Film, 10KΩ, 50 V, 0603 [1608 Metric], 100 mW, 0.1% , RP73 Series", Manufacturer="TE Connectivity", Package=RP731J, Power Rating=0.1W, Resistance=10KΩ, Temperature="-55°C to +105°C", Temperature Coefficient=15ppm/°C, Temperature Range High=+105°C, Temperature Range Low=-55°C, Tolerance=0.1%, Voltage Rating=75V, Automotive=No, Category=Res, ComponentLink2Description=Datasheet, ComponentLink2URL=https://www.te.com/commerce/DocumentDelivery/DDEController?Action=srchrtrv&DocNm=1773272&DocType=DS&DocLang=English, Composition="Thin Film", Device Class L1="Passive Components", Device Class L2=Resistors, Device Class L3="Chip SMD Resistors", Height=0.55mm, Ipc Land Pattern Name=RESC15580X45, Lead Free=Yes, Manufacturer Part Number=RP73D1J10KBTDG, Octopart=https://octopart.com/rp73d1j10kbtdg-te+connectivity-42631518, octopart_url=https://octopart.com/rp73d1j10kbtdg-te+connectivity-42631518, Packaging="cut tape", RoHS=TRUE, Series=RP73
SW?: library part CMP-1696-00002-1, "Slide Switch, 500 V, -20 to 70 degC, 3-Pin THD, RoHS", Case\Package=SOT-23-5, Dropout Voltage="300 mV", Max Input Voltage="8 V", Max Operating Temperature="85 degC", Max Ouput Current="150 mA", Max Power Dissipation="250 mW", Min Input Voltage="4.3 V", Min Operating Temperature="-40 degC", Nominal Output Voltage="3.3 V", Package Quantity=3000, ComponentLink1Description="Manufacturer URL", ComponentLink1URL=http://www.e-switch.ch/en/, ComponentLink2Description=Datasheet, ComponentLink2URL=https://www.e-switch.com/system/asset/product_line/data_sheet/119/EG.pdf, DatasheetVersion=Oct-15, Height="1.3 mm", Length="3 mm", Mount="Surface Mount", Output Current="150 mA", Output Voltage="3.3 V", Outputs=1, PackageDescription="3-Pin Through Hole Device, Body 11.6 x 4 mm, Pitch 2.5 mm", PackageReference=EG1218, Packaging="Tape and Reel", Pins=5, Power Rating="250 mW", Radiation Hardening=No, REACH SVHC="No SVHC", RoHSCompliant=true, Width="1.8 mm"
U1 U5 U10 U11 U12: library part CMP-2100-03649-1, "Dual Full-Bridge Driver, 4.5 to 7 V, -25 to 130 degC, 20-Pin SOIC, RoHS, Tube", Case/Package=SOIC, Collector Emitter Voltage (VCEO)=46V, LCSC=C17179540, Manufacturer=STMicroelectronics, Max Collector Current=3A, Max Operating Temperature=130degC, Min Operating Temperature=-25degC, Min Supply Voltage=4.8V, Operating Supply Current=13mA, Output Current=2A, Package Description="20-Pin Small Outline Integrated Circuits, Body 15.9 x 11 mm, Pitch 1.27 mm", Package Quantity=31, Package Reference=PowerSO20, Supply Voltage=42V, Datasheet URL=http://www.st.com/content/ccc/resource/technical/document/datasheet/82/cc/3f/39/0a/29/4d/f0/CD00000240.pdf/files/CD00000240.pdf/jcr:content/translations/en.CD00000240.pdf, Datasheet Version=36526.0, Height=3.3mm, Lead Free=LeadFree, Length=16mm, Manufacturer URL=http://www.st.com/, Max Output Current=3A, Max Supply Voltage=46V, Mount=SurfaceMount, Number of Channels=2, Number of Pins=20, Output Current per Channel=2A, Packaging=Rail/Tube, Radiation Hardening=No, RoHSCompliant=true, Width=11.1mm
U2 U3 U4: library part TMC2209_plug
U6: library part CMP-0243-00016-3, "ARM Cortex-M4 32-bit MCU+FPU, 210 DMIPS, 512 kB Flash, 192 kB Internal RAM, 82 I/Os, 100-pin LQFP, -40 to 85 degC, Tray", I/Os (High Current)=82, LCSC=C28730, Manufacturer=STMicroelectronics, Operating Frequency(F) (Processor speed) (MHz)=168, Supply Voltage(Vcc) max (V)=3.6, Supply Voltage(Vcc) min (V)=1.8, ComponentLink1Description="Manufacturer URL", ComponentLink1URL=http://www.st.com/web/en/home.html, ComponentLink2Description=Datasheet, ComponentLink2URL=http://www.st.com/st-web-ui/static/active/en/resource/technical/document/datasheet/DM00037051.pdf, ComponentLink3Description="Package Specification", ComponentLink3URL=http://www.st.com/st-web-ui/static/active/en/resource/technical/document/data_brief/DM00071938.pdf, Core="ARM Cortex-M4", D/A Converter=2x12-bit, DatasheetVersion="Rev. 4", FLASH Size (Prog) (kB)=512, Internal RAM Size (kB)=192, Mounting Technology="Surface Mount", PackageDescription="100-Pin Low Profile Quad Flat Package, 14 x 14 mm Body, 0.5 mm Pitch", PackageReference=LQFP100, PackageVersion="Rev. 1, 06/2013", Packing=Tray, PartNumber=STM32F407VET6
U7: library part CMP-0069-00276-3, "SIMPLE SWITCHER® Power Converter 150 KHz 3A Step-Down Voltage Regulator, 5-pin TO-263", Manufacturer="Texas Instruments", PackageTopMarking="NSUZXYTTE#*LM2596S*-3.3 P+", PowerWise=N, Code_JEDEC=MO-169-AB, ComponentLink1Description="Datasheet URL", ComponentLink1URL=http://www.ti.com/general/docs/lit/getliterature.tsp?genericPartNumber=LM2596&fileType=pdf, CompType=Switcher, PackageDescription="TO-263, Molded, .400 x .390 x .180in, 5 Lead, .067in Pitch, Surface Mount", PackageReference=KTT0005B, PinCount=5, RoHS=N
U8: library part CMP-0244-00316-1, "1A, Low Drop Positive Voltage Regulator, 3.3V, 4-Pin SOT-223, Tape and Reel", ComponentLink1Description="Manufacturer URL", ComponentLink1URL=http://www.st.com, ComponentLink2Description=Datasheet, ComponentLink2URL=http://www.st.com/internet/com/TECHNICAL_RESOURCES/TECHNICAL_LITERATURE/DATASHEET/CD00002116.pdf, DatasheetVersion=2/12/2011, PackageDescription="4-Pin SOT-223 Package, 6.5 x 3.5 mm Body, 2.3 mm Pitch, 7 mm Lead Span", PackageReference=SOT-223, PackageVersion=2010
U9: library part CMP-0069-00270-3, "SIMPLE SWITCHER® Power Converter 150 KHz 3A Step-Down Voltage Regulator, 5-pin TO-263", LCSC=C347421, Manufacturer="Texas Instruments", PackageTopMarking="NSUZXYTTE#*LM2596S*-5.0 P+", PowerWise=N, Code_JEDEC=MO-169-AB, ComponentLink1Description="Datasheet URL", ComponentLink1URL=http://www.ti.com/general/docs/lit/getliterature.tsp?genericPartNumber=LM2596&fileType=pdf, CompType=Switcher, PackageDescription="TO-263, Molded, .400 x .390 x .180in, 5 Lead, .067in Pitch, Surface Mount", PackageReference=KTT0005B, PinCount=5, RoHS=N
U17: library part CMP-0069-00272-2, "SIMPLE SWITCHER® Power Converter 150 KHz 3A Step-Down Voltage Regulator, 5-pin TO-263", LCSC=C5276751, Manufacturer="National Semiconductor", PackageTopMarking="NSUZXYTTE#*LM2596S*-ADJ P+", PowerWise=N, Code_JEDEC=MO-169-AB, ComponentLink1Description="LM2596 Datasheet", ComponentLink1URL=http://www.national.com/ds/LM/LM2596.pdf, ComponentLink2Description="LM2596 Web Page", ComponentLink2URL=http://www.national.com/pf/LM/LM2596.html, ComponentLink3Description="TS5B Package Page", ComponentLink3URL=http://www.national.com/packaging/folders/ts5b.html, CompType=Switcher, DatasheetVersion=May-2002, PackageDescription="TO-263, Molded, .400 x .390 x .180in, 5 Lead, .067in Pitch, Surface Mount", PackageReference=TS5B, PackageVersion="revD, Apr-2005", PinCount=5, RevisionNote="Component URLs added", RoHS=N
Y1: library part CMP-27762-009874-1, "CRYSTAL 8.0000MHZ 18PF SMD", Case/Package=SMD/SMT, ESR (Equivalent Series Resistance)=80R, Frequency=8MHz, Frequency Stability=50ppm, Frequency Tolerance=20ppm, Load Capacitance=18pF, Max Operating Temperature=70°C, Min Operating Temperature=-20°C, Operating Frequency="8 MHz", Package Quantity=1000, Accuracy=20ppm, Contact Plating=Tin, Depth=4.7mm, Height=0.165inch, Lead Free="Lead Free", Length=11.4mm, Mount="Surface Mount", Number of Pins=2, Packaging="Tape and Reel", Radiation Hardening=No, REACH SVHC="No SVHC", Series=ABLS, Series Resistance=80R, Termination=SMD/SMT, Tolerance=20ppm, Width=4.7mm

## Via types
v1: diameter 19.68, hole 7.87, Top Layer to Bottom Layer, 420 vias
v2: diameter 35.43, hole 35.43, Top Layer to Bottom Layer, 2 vias

## Nets (pads, with @x,y where several pads share a name; then routed paths per layer and width w, separated by ;. In a path a pad name is that pad's centre, name@x,y a point inside that pad or via, vN(x,y) a via of type N, cw(c..) or ccw(c..) an arc to the next point about the centre after c; other vN are vias at no path point)
+3.3: C2.2 C4.2 C5.2 C6.1 C9.2 C10.2 C11.2 C12.2 C13.2 C14.2 C17.1 J4.5 J?.1 L1.2 SW?.1 U2.10 U3.10 U4.10 U6.6 U6.11 U6.19 U6.21 U6.22 U6.28 U6.50 U6.75 U6.100 U7.4 U8.2 U8.4
+5: C8.2 C26.1 L2.2 U1.12 U5.12 U9.4 U10.12 U11.12 U12.12
+7: C30.2 C35.2 C37.1 D1.1 D2.1 L7.2 R1.2 U1.6
+12_1: D13.1 D14.1 U12.6
+12_2: D9.1 D10.1 U10.6
+12_3: D11.1 D12.1 U11.6
+12_4: D7.1 D8.1 U5.6
+24: C1.2 C7.2 C16.1 C25.1 C34.2 C36.1 J1.1 U2.16 U3.16 U4.16 U7.1 U9.1 U17.1
ADC1_IN0_ACT: J4.2 U6.23
ADC1_IN1_ROT1: U6.24
ADC1_IN2_ROT2: U6.25
BOOT0: R?.1 U6.94
DC1_IN1: U6.51 U12.7
DC1_IN2: U6.52 U12.9
DC2_IN1: U6.53 U10.7
DC2_IN2: U6.54 U10.9
DC3_IN1: U6.1 U11.7
DC3_IN2: U6.2 U11.9
DC4_IN1: U5.7 U6.3
DC4_IN2: U5.9 U6.4
DIAG1: U6.67
DIAG2: U3.18 U6.66
DIAG3: U4.18 U6.65
DIR1: U2.8 U6.41
DIR2: U6.43
DIR3: U6.39
DIR4: U6.46
DIR5: U6.31
DIR6: U6.88
GND: C1.1 C2.1 C3.1 C4.1 C5.1 C6.2 C7.1 C8.1 C9.1 C10.1 C11.1 C12.1 C13.1 C14.1 C15.1 C16.2 C17.2 C21.2 C25.2 C26.2 C34.1 C35.1 C36.2 C37.2 D3.2 D4.2 D5.2 D6.2 D15.2 D16.2 D17.2 D18.2 D19.2 D20.2 D21.2 D22.2 D27.2 J1.2 J4.1 J?.4 SW?.3 U1.1 U1.10 U1.11 U1.20 U1.21 U2.1 U2.2 U2.3 U2.4 U2.9 U2.15 U3.15 U4.15 U6.10 U6.20 U6.27 U6.74 U6.99 U7.3 U7.5 U7.6 U8.1 U9.3 U9.5 U9.6 U10.1 U10.10 U10.11 U10.20 U10.21 U11.1 U11.10 U11.11 U11.20 U11.21 U12.1 U12.10 U12.11 U12.20 U12.21 U17.3 U17.6
  other v1: 2883.58,846.89 2926.89,846.89 2970.2,846.89 3013.5,846.89 3056.81,846.89 3100.12,846.89 2883.58,890.2 2926.89,890.2 2970.2,890.2 3013.5,890.2 3056.81,890.2 3100.12,890.2 2883.58,933.5 2926.89,933.5 2970.2,933.5 3013.5,933.5 3056.81,933.5 3100.12,933.5 2883.58,976.81 2926.89,976.81 2970.2,976.81 3013.5,976.81 3056.81,976.81 3100.12,976.81 2883.58,1020.12 2926.89,1020.12 2970.2,1020.12 3013.5,1020.12 3056.81,1020.12 3100.12,1020.12 2883.58,1063.43 2926.89,1063.43 2970.2,1063.43 3013.5,1063.43 3056.81,1063.43 3100.12,1063.43 2883.58,1106.73 2926.89,1106.73 2970.2,1106.73 3013.5,1106.73 3056.81,1106.73 3100.12,1106.73 2883.58,1150.04 2926.89,1150.04 2970.2,1150.04 3013.5,1150.04 3056.81,1150.04 3100.12,1150.04 2883.58,1193.35 2926.89,1193.35 2970.2,1193.35 3013.5,1193.35 3056.81,1193.35 3100.12,1193.35 2883.58,1236.65 2926.89,1236.65 2970.2,1236.65 3013.5,1236.65 3056.81,1236.65 3100.12,1236.65 2883.58,1279.96 2926.89,1279.96 2970.2,1279.96 3013.5,1279.96 3056.81,1279.96 3100.12,1279.96 2883.58,1323.27 2926.89,1323.27 2970.2,1323.27 3013.5,1323.27 3056.81,1323.27 3100.12,1323.27 2883.58,1366.57 2926.89,1366.57 2970.2,1366.57 3013.5,1366.57 3056.81,1366.57 3100.12,1366.57 2883.58,1409.88 2926.89,1409.88 2970.2,1409.88 3013.5,1409.88 3056.81,1409.88 3100.12,1409.88 3710.63,1765.75 3753.94,1765.75 3797.24,1765.75 3840.55,1765.75 3883.86,1765.75 3927.17,1765.75 3710.63,1809.06 3753.94,1809.06 3797.24,1809.06 3840.55,1809.06 3883.86,1809.06 3927.17,1809.06 3710.63,1852.36 3753.94,1852.36 3797.24,1852.36 3840.55,1852.36 3883.86,1852.36 3927.17,1852.36 3710.63,1895.67 3753.94,1895.67 3797.24,1895.67 3840.55,1895.67 3883.86,1895.67 3927.17,1895.67 3710.63,1938.98 3753.94,1938.98 3797.24,1938.98 3840.55,1938.98 3883.86,1938.98 3927.17,1938.98 3710.63,1982.28 3753.94,1982.28 3797.24,1982.28 3840.55,1982.28 3883.86,1982.28 3927.17,1982.28 3710.63,2025.59 3753.94,2025.59 3797.24,2025.59 3840.55,2025.59 3883.86,2025.59 3927.17,2025.59 3710.63,2068.9 3753.94,2068.9 3797.24,2068.9 3840.55,2068.9 3883.86,2068.9 3927.17,2068.9 3710.63,2112.2 3753.94,2112.2 3797.24,2112.2 3840.55,2112.2 3883.86,2112.2 3927.17,2112.2 3710.63,2155.51 3753.94,2155.51 3797.24,2155.51 3840.55,2155.51 3883.86,2155.51 3927.17,2155.51 3710.63,2198.82 3753.94,2198.82 3797.24,2198.82 3840.55,2198.82 3883.86,2198.82 3927.17,2198.82 3710.63,2242.13 3753.94,2242.13 3797.24,2242.13 3840.55,2242.13 3883.86,2242.13 3927.17,2242.13 3710.63,2285.43 3753.94,2285.43 3797.24,2285.43 3840.55,2285.43 3883.86,2285.43 3927.17,2285.43 3710.63,2328.74 3753.94,2328.74 3797.24,2328.74 3840.55,2328.74 3883.86,2328.74 3927.17,2328.74 4596.73,3408.5 4640.04,3408.5 4683.35,3408.5 4726.65,3408.5 4769.96,3408.5 4813.27,3408.5 4596.73,3451.81 4640.04,3451.81 4683.35,3451.81 4726.65,3451.81 4769.96,3451.81 4813.27,3451.81 4596.73,3495.12 4640.04,3495.12 4683.35,3495.12 4726.65,3495.12 4769.96,3495.12 4813.27,3495.12 4596.73,3538.43 4640.04,3538.43 4683.35,3538.43 4726.65,3538.43 4769.96,3538.43 4813.27,3538.43 4596.73,3581.73 4640.04,3581.73 4683.35,3581.73 4726.65,3581.73 4769.96,3581.73 4813.27,3581.73 4596.73,3625.04 4640.04,3625.04 4683.35,3625.04 4726.65,3625.04 4769.96,3625.04 4813.27,3625.04 4596.73,3668.35 4640.04,3668.35 4683.35,3668.35 4726.65,3668.35 4769.96,3668.35 4813.27,3668.35 5230.31,3710.63 5273.62,3710.63 5316.93,3710.63 5360.24,3710.63 5403.54,3710.63 5446.85,3710.63 5490.16,3710.63 5533.46,3710.63 5576.77,3710.63 5620.08,3710.63 5663.39,3710.63 5706.69,3710.63 5750,3710.63 5793.31,3710.63 4596.73,3711.65 4640.04,3711.65 4683.35,3711.65 4726.65,3711.65 4769.96,3711.65 4813.27,3711.65 5230.31,3753.94 5273.62,3753.94 5316.93,3753.94 5360.24,3753.94 5403.54,3753.94 5446.85,3753.94 5490.16,3753.94 5533.46,3753.94 5576.77,3753.94 5620.08,3753.94 5663.39,3753.94 5706.69,3753.94 5750,3753.94 5793.31,3753.94 4596.73,3754.96 4640.04,3754.96 4683.35,3754.96 4726.65,3754.96 4769.96,3754.96 4813.27,3754.96 5230.31,3797.24 5273.62,3797.24 5316.93,3797.24 5360.24,3797.24 5403.54,3797.24 5446.85,3797.24 5490.16,3797.24 5533.46,3797.24 5576.77,3797.24 5620.08,3797.24 5663.39,3797.24 5706.69,3797.24 5750,3797.24 5793.31,3797.24 4596.73,3798.27 4640.04,3798.27 4683.35,3798.27 4726.65,3798.27 4769.96,3798.27 4813.27,3798.27 5230.31,3840.55 5273.62,3840.55 5316.93,3840.55 5360.24,3840.55 5403.54,3840.55 5446.85,3840.55 5490.16,3840.55 5533.46,3840.55 5576.77,3840.55 5620.08,3840.55 5663.39,3840.55 5706.69,3840.55 5750,3840.55 5793.31,3840.55 4596.73,3841.57 4640.04,3841.57 4683.35,3841.57 4726.65,3841.57 4769.96,3841.57 4813.27,3841.57 5230.31,3883.86 5273.62,3883.86 5316.93,3883.86 5360.24,3883.86 5403.54,3883.86 5446.85,3883.86 5490.16,3883.86 5533.46,3883.86 5576.77,3883.86 5620.08,3883.86 5663.39,3883.86 5706.69,3883.86 5750,3883.86 5793.31,3883.86 4596.73,3884.88 4640.04,3884.88 4683.35,3884.88 4726.65,3884.88 4769.96,3884.88 4813.27,3884.88 5230.31,3927.17 5273.62,3927.17 5316.93,3927.17 5360.24,3927.17 5403.54,3927.17 5446.85,3927.17 5490.16,3927.17 5533.46,3927.17 5576.77,3927.17 5620.08,3927.17 5663.39,3927.17 5706.69,3927.17 5750,3927.17 5793.31,3927.17 4596.73,3928.19 4640.04,3928.19 4683.35,3928.19 4726.65,3928.19 4769.96,3928.19 4813.27,3928.19 4596.73,3971.5 4640.04,3971.5 4683.35,3971.5 4726.65,3971.5 4769.96,3971.5 4813.27,3971.5
I2C1_SCL: U6.95
I2C1_SDA: U6.93
IN1: U1.7 U6.34
IN2: U1.9 U6.35
LED: U6.7
NetC3_2: C3.2 U6.12 Y1.1
NetC15_2: C15.2 U6.13 Y1.2
NetC21_1: C21.1 J3.4 J3.5 U8.3
NetC30_1: C30.1 R1.1 R2.2 U17.4
NetD1_2: D1.2 D3.1 J4.3 U1.4
NetD2_2: D2.2 D4.1 J4.4 U1.5
NetD5_1: D5.1 L1.1 U7.2
NetD6_1: D6.1 L2.1 U9.2
NetD7_2: D7.2 D15.1 J8.1 U5.4
NetD8_2: D8.2 D16.1 J8.2 U5.5
NetD9_2: D9.2 D17.1 J10.1 U10.4
NetD10_2: D10.2 D18.1 J10.2 U10.5
NetD11_2: D11.2 D19.1 J11.1 U11.4
NetD12_2: D12.2 D20.1 J11.2 U11.5
NetD13_2: D13.2 D21.1 J9.1 U12.4
NetD14_2: D14.2 D22.1 J9.2 U12.5
NetD27_1: D27.1 L7.1 U17.2
NetJ5_1: J5.1 U3.14
NetJ5_2: J5.2 U3.13
NetJ5_3: J5.3 U3.12
NetJ5_4: J5.4 U3.11
NetJ6_1: J6.1 U2.14
NetJ6_2: J6.2 U2.13
NetJ6_3: J6.3 U2.12
NetJ6_4: J6.4 U2.11
NetJ7_1: J7.1 U4.14
NetJ7_2: J7.2 U4.13
NetJ7_3: J7.3 U4.12
NetJ7_4: J7.4 U4.11
NetR2_1: R2.1 U17.5
NetR?_2: R?.2 SW?.2
NetU5_1: U5.1 U5.10 U5.11 U5.20 U5.21
  other v1: 1251.73,3228.5 1295.04,3228.5 1338.35,3228.5 1381.65,3228.5 1424.96,3228.5 1468.27,3228.5 1251.73,3271.81 1295.04,3271.81 1338.35,3271.81 1381.65,3271.81 1424.96,3271.81 1468.27,3271.81 1251.73,3315.12 1295.04,3315.12 1338.35,3315.12 1381.65,3315.12 1424.96,3315.12 1468.27,3315.12 1251.73,3358.43 1295.04,3358.43 1338.35,3358.43 1381.65,3358.43 1424.96,3358.43 1468.27,3358.43 1251.73,3401.73 1295.04,3401.73 1338.35,3401.73 1381.65,3401.73 1424.96,3401.73 1468.27,3401.73 1251.73,3445.04 1295.04,3445.04 1338.35,3445.04 1381.65,3445.04 1424.96,3445.04 1468.27,3445.04 1251.73,3488.35 1295.04,3488.35 1338.35,3488.35 1381.65,3488.35 1424.96,3488.35 1468.27,3488.35 1251.73,3531.65 1295.04,3531.65 1338.35,3531.65 1381.65,3531.65 1424.96,3531.65 1468.27,3531.65 1251.73,3574.96 1295.04,3574.96 1338.35,3574.96 1381.65,3574.96 1424.96,3574.96 1468.27,3574.96 1251.73,3618.27 1295.04,3618.27 1338.35,3618.27 1381.65,3618.27 1424.96,3618.27 1468.27,3618.27 1251.73,3661.57 1295.04,3661.57 1338.35,3661.57 1381.65,3661.57 1424.96,3661.57 1468.27,3661.57 1251.73,3704.88 1295.04,3704.88 1338.35,3704.88 1381.65,3704.88 1424.96,3704.88 1468.27,3704.88 1251.73,3748.19 1295.04,3748.19 1338.35,3748.19 1381.65,3748.19 1424.96,3748.19 1468.27,3748.19 1251.73,3791.5 1295.04,3791.5 1338.35,3791.5 1381.65,3791.5 1424.96,3791.5 1468.27,3791.5
SWCLK: J?.3 U6.76
SWDIO: J?.2 U6.72
TIM1_CH1: U2.7 U6.40
TIM1_CH2: U6.42
TIM1_CH3: U6.44
TIM1_CH4: U6.45
TIM2_CH1: U6.30
TIM2_CH2: U6.89
TIM2_CH3: U1.8 U6.47
TIM2_CH4: U6.29
TIM4_CH1: U6.59 U12.8
TIM4_CH2: U6.60 U10.8
TIM4_CH3: U6.61 U11.8
TIM4_CH4: U5.8 U6.62
UART4_RX: U6.79
UART4_TX: U6.78
UART5_RX: U6.83
UART5_TX: U6.80
USART1_RX: U6.69
USART1_TX: U6.92
USART2_RX: U2.6 U6.26
USART2_TX: U2.5 U6.86
USART3_RX: U6.48
USART3_TX: U6.55
USB_OTG_FS_DM: U6.70
USB_OTG_FS_DP: U6.71
VBUS: J3.1 J3.2
pads on no net: J2. J2.1 J2.2 J2.3 J2.4 J2.5 J2.6 J3.3 J3.6 U1.2 U1.3 U1.13 U1.14 U1.15 U1.16 U1.17 U1.18 U1.19 U2.17 U2.18 U3.1 U3.2 U3.3 U3.4 U3.5 U3.6 U3.7 U3.8 U3.9 U3.17 U4.1 U4.2 U4.3 U4.4 U4.5 U4.6 U4.7 U4.8 U4.9 U4.17 U5.2 U5.3 U5.13 U5.14 U5.15 U5.16 U5.17 U5.18 U5.19 U6.5 U6.8 U6.9 U6.14 U6.15 U6.16 U6.17 U6.18 U6.32 U6.33 U6.36 U6.37 U6.38 U6.49 U6.56 U6.57 U6.58 U6.63 U6.64 U6.68 U6.73 U6.77 U6.81 U6.82 U6.84 U6.85 U6.87 U6.90 U6.91 U6.96 U6.97 U6.98 U10.2 U10.3 U10.13 U10.14 U10.15 U10.16 U10.17 U10.18 U10.19 U11.2 U11.3 U11.13 U11.14 U11.15 U11.16 U11.17 U11.18 U11.19 U12.2 U12.3 U12.13 U12.14 U12.15 U12.16 U12.17 U12.18 U12.19
copper on no net:
  other v2: 3964.37,4725.24 4082.48,4725.24